# Altium PCB ADCAN_21_22.PcbDoc (part 2 of 2)
Units mm, origin at the board's own origin, x right, y up, seen from the top; angles counter-clockwise.
Board outline 65 x 55 mm, 4 copper layers (Top Layer, GND, 5V, Bottom Layer), stack 0.603 mm thick; 114 components, 59 nets, 280 pads, 0 vias.
Unrouted connection lines stored in the file: 212.
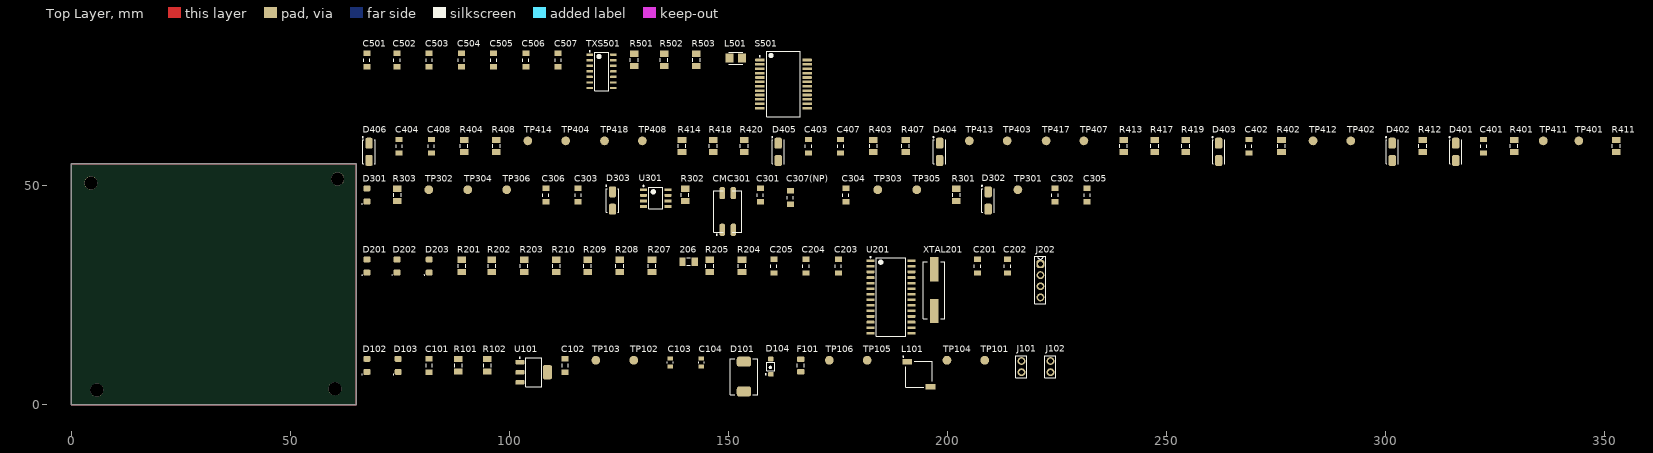
[diagram p0: Top Layer view]

## Part data (continued)
R204 R207: library part R2.2K-1206FTK, "Res Thick Film 1206 2.2K Ohm 1% 1/4W ±100ppm/°C Molded SMD SMD Paper Tape on Plastic Reel", Case Code (Imperial)=1206, Case Code (Metric)=3216, Manufacturer 1=Bourns, Max Operating Temperature=155°C, Max Power Dissipation=250mW, Min Operating Temperature=-55°C, Package Quantity=5000, Resistance=2.2kR, Resistance Tolerance=1%, Resistor Type="Thick Film", Supplier Part Number 1=CR1206-FX-2201ELFCT-ND, Temperature Coefficient=100ppm/°C, Voltage Rating=200V, Case/Package=1206, Category="Chip SMD Resistors", ComponentLink1Description=https://datasheet.ciiva.com/11809/0900766b80fcdb72-11809898.pdf?src-supplier=RSComponents, ComponentLink1URL=https://datasheet.ciiva.com/11809/0900766b80fcdb72-11809898.pdf?src-supplier=RSComponents, ComponentLink2Description=https://datasheet.ciiva.com/9123/chpreztr-9123227.pdf?src-supplier=Avnet, ComponentLink2URL=https://datasheet.ciiva.com/9123/chpreztr-9123227.pdf?src-supplier=Avnet, ComponentLink3Description=https://datasheet.ciiva.com/16770/70154685-16770447.pdf?src-supplier=Allied+Electronics, ComponentLink3URL=https://datasheet.ciiva.com/16770/70154685-16770447.pdf?src-supplier=Allied+Electronics, ComponentLink4Description=https://datasheet.ciiva.com/7985/1856384-7985879.pdf?src-supplier=Element14, ComponentLink4URL=https://datasheet.ciiva.com/7985/1856384-7985879.pdf?src-supplier=Element14, ComponentLink5Description=https://datasheet.ciiva.com/22693/1902866-22693258.pdf?src-supplier=Element14, ComponentLink5URL=https://datasheet.ciiva.com/22693/1902866-22693258.pdf?src-supplier=Element14, ComponentLink6Description=RS, ComponentLink6URL=https://es.rs-online.com/web/p/resistencias-fijas-para-montaje-en-superficie/7409097/, Construction=Rectangular, Contact Plating=Tin, Depth=1.6mm, Features="Moisture Resistant", Height=0.6mm, Length=3.2mm, Manufacturer Part Number 1=CR1206-FX-2201ELF, Military Standard=Not, Mount="Surface Mount", Number of Pins=2, Number of Terminations=2, Packaging="Tape and Reel", Power Rating=250mW, Pricing 1="1=0,10000, 10=0,04200, 100=0,01700, 1000=0,00762, 2500=0,00661 (USD)", Radiation Hardening=No, REACH SVHC="No SVHC", RoHS=Yes, RoHS Compliant=Yes, Series=CR1206, Stock 1=150, Supplier 1=Digi-Key, Technology="THICK FILM", Termination=SMD/SMT, Thickness=610um, Tolerance=1%, Voltage Rating (DC)=200V, Width=1.6mm
R301 R302: library part R60-1206FTN, "Res Precision Thin Film 60.4Ohm 0.1% 400mW 10ppm/°C 2-Pin 1206 SMD T/R", Manufacturer="TE Connectivity Holsworthy", Supplier Part Number 1=1872611, Category=Resistor, ComponentLink1Description=Datasheet, ComponentLink1URL=https://docs.rs-online.com/7017/0900766b8171e31c.pdf, ComponentLink2Description="Where buy it", ComponentLink2URL=https://es.rs-online.com/web/p/resistencias-de-montaje-en-superficie/1873086, Manufacturer Part Number=RQ73C2B60R4BTDF, Pricing 1="1000=1,73300 (GBP)", RoHS=Yes, Stock 1=650, Supplier 1=RSComponents
R401 R402 R403 R404 R411 R412 R413 R414 R417 R418: library part R1.6K-1206FTK, "Res Thick Film 1206 1.6K Ohm 1% 1/4W ±100ppm/°C Molded SMD SMD Paper T/R", Case Code (Imperial)=1206, Case Code (Metric)=3216, Manufacturer 1=Vishay, Max Operating Temperature=155°C, Max Power Dissipation=250mW, Min Operating Temperature=-55°C, Package Quantity=5000, Resistance=1.6kR, Resistance Tolerance=1%, Resistor Type="Thick Film", Supplier Part Number 1=541-1.60KFCT-ND, Temperature Coefficient=100ppm/°C, Voltage Rating=200V, Case/Package=1206, Category="Chip SMD Resistors", ComponentLink1Description=https://datasheet.ciiva.com/11811/0900766b80d98b5e-11811377.pdf?src-supplier=RSComponents, ComponentLink1URL=https://datasheet.ciiva.com/11811/0900766b80d98b5e-11811377.pdf?src-supplier=RSComponents, ComponentLink2Description=https://datasheet.ciiva.com/2515/dcrcwe3-2515616.pdf?src-supplier=Digi-Key, ComponentLink2URL=https://datasheet.ciiva.com/2515/dcrcwe3-2515616.pdf?src-supplier=Digi-Key, ComponentLink3Description=https://datasheet.ciiva.com/2515/dcrcwe3-2515617.pdf?src-supplier=Digi-Key, ComponentLink3URL=https://datasheet.ciiva.com/2515/dcrcwe3-2515617.pdf?src-supplier=Digi-Key, ComponentLink4Description=https://datasheet.ciiva.com/2515/dcrcwe3-2515618.pdf?src-supplier=Digi-Key, ComponentLink4URL=https://datasheet.ciiva.com/2515/dcrcwe3-2515618.pdf?src-supplier=Digi-Key, ComponentLink5Description=https://datasheet.ciiva.com/9098/dcrcwe3-9098889.pdf?src-supplier=Avnet, ComponentLink5URL=https://datasheet.ciiva.com/9098/dcrcwe3-9098889.pdf?src-supplier=Avnet, ComponentLink6Description=https://datasheet.ciiva.com/16213/dcrcwe3-16213498.pdf?src-supplier=Future+Electronics, ComponentLink6URL=https://datasheet.ciiva.com/16213/dcrcwe3-16213498.pdf?src-supplier=Future+Electronics, ComponentLink7Description=https://datasheet.ciiva.com/17203/dcrcwe3-17203786.pdf?src-supplier=Avnet+Europe, ComponentLink7URL=https://datasheet.ciiva.com/17203/dcrcwe3-17203786.pdf?src-supplier=Avnet+Europe, ComponentLink8Description=https://datasheet.ciiva.com/7670/1697337-7670316.pdf?src-supplier=Element14, ComponentLink8URL=https://datasheet.ciiva.com/7670/1697337-7670316.pdf?src-supplier=Element14, ComponentLink9Description=https://datasheet.ciiva.com/7670/1697337-7670317.pdf?src-supplier=Element14, ComponentLink9URL=https://datasheet.ciiva.com/7670/1697337-7670317.pdf?src-supplier=Element14, ComponentLink10Description=https://datasheet.ciiva.com/5550/dcrcwe3-109170-5550718.pdf?src-supplier=Mouser, ComponentLink10URL=https://datasheet.ciiva.com/5550/dcrcwe3-109170-5550718.pdf?src-supplier=Mouser, ComponentLink11Description=RS, ComponentLink11URL=https://es.rs-online.com/web/p/resistencias-fijas-para-montaje-en-superficie/6791866/, Construction=Rectangular, Contact Plating=Tin, Depth=1.6mm, Features="Automotive AEC-Q200", Height=0.55mm, Lead Free="Lead Free", Length=3.2mm, Manufacturer Part Number 1=CRCW12061K60FKEA, Military Standard=Not, Number of Pins=2, Number of Terminations=2, Packaging="Tape and Reel", Power Rating=250mW, Pricing 1="1=0,10000, 10=0,08200, 100=0,03160, 1000=0,01392, 2500=0,01202 (USD)", Radiation Hardening=No, REACH SVHC=Unknown, RoHS=Yes, RoHS Compliant=Yes, Series=CRCW, Size Code=1206, Supplier 1=Digi-Key, Technology="THICK FILM", Termination=SMD/SMT, Tolerance=1%, Voltage Rating (DC)=200V, Weight=0.000353oz, Width=0.063inch
R407 R408: library part R4.3K-1206FTK, "Res Thick Film 1206 4.3K Ohm 1% 1/4W ±100ppm/°C Molded SMD SMD Paper T/R", Case Code (Imperial)=1206, Case Code (Metric)=3216, Manufacturer 1=Vishay, Max Operating Temperature=155°C, Max Power Dissipation=250mW, Min Operating Temperature=-55°C, Package Quantity=10, Resistance=1.6kR, Resistance Tolerance=1%, Resistor Type="Thick Film", Supplier Part Number 1=541-4.30KFCT-ND, Temperature Coefficient=100ppm/°C, Voltage Rating=200V, Case/Package=1206, Category="Chip SMD Resistors", ComponentLink1Description=https://datasheet.ciiva.com/11811/0900766b80d98b5e-11811783.pdf?src-supplier=RSComponents, ComponentLink1URL=https://datasheet.ciiva.com/11811/0900766b80d98b5e-11811783.pdf?src-supplier=RSComponents, ComponentLink2Description=https://datasheet.ciiva.com/2497/dcrcwe3-2497360.pdf?src-supplier=Digi-Key, ComponentLink2URL=https://datasheet.ciiva.com/2497/dcrcwe3-2497360.pdf?src-supplier=Digi-Key, ComponentLink3Description=https://datasheet.ciiva.com/2497/dcrcwe3-2497361.pdf?src-supplier=Digi-Key, ComponentLink3URL=https://datasheet.ciiva.com/2497/dcrcwe3-2497361.pdf?src-supplier=Digi-Key, ComponentLink4Description=https://datasheet.ciiva.com/2497/dcrcwe3-2497362.pdf?src-supplier=Digi-Key, ComponentLink4URL=https://datasheet.ciiva.com/2497/dcrcwe3-2497362.pdf?src-supplier=Digi-Key, ComponentLink5Description=https://datasheet.ciiva.com/7679/1533075-7679286.pdf?src-supplier=Element14, ComponentLink5URL=https://datasheet.ciiva.com/7679/1533075-7679286.pdf?src-supplier=Element14, ComponentLink6Description=https://datasheet.ciiva.com/5562/dcrcwe3-109170-5562219.pdf?src-supplier=Mouser, ComponentLink6URL=https://datasheet.ciiva.com/5562/dcrcwe3-109170-5562219.pdf?src-supplier=Mouser, ComponentLink7Description=https://datasheet.ciiva.com/17196/dcrcwe3-17196843.pdf?src-supplier=Avnet+Europe, ComponentLink7URL=https://datasheet.ciiva.com/17196/dcrcwe3-17196843.pdf?src-supplier=Avnet+Europe, ComponentLink8Description=https://datasheet.ciiva.com/7679/1697337-7679213.pdf?src-supplier=Element14, ComponentLink8URL=https://datasheet.ciiva.com/7679/1697337-7679213.pdf?src-supplier=Element14, ComponentLink9Description=https://datasheet.ciiva.com/9073/dcrcwe3-9073935.pdf?src-supplier=Avnet, ComponentLink9URL=https://datasheet.ciiva.com/9073/dcrcwe3-9073935.pdf?src-supplier=Avnet, ComponentLink10Description=RS, ComponentLink10URL=https://es.rs-online.com/web/p/resistencias-fijas-para-montaje-en-superficie/6792187/, Construction=Rectangular, Contact Plating=Tin, Depth=1.6mm, Features="Automotive AEC-Q200", Height=0.55mm, Lead Free="Lead Free", Length=3.2mm, Manufacturer Part Number 1=CRCW12064K30FKEA, Military Standard=Not, Number of Pins=2, Number of Terminations=2, Packaging="Tape and Reel", Power Rating=250mW, Pricing 1="1=0,10000, 10=0,08200, 100=0,03160, 1000=0,01392, 2500=0,01202 (USD)", Radiation Hardening=No, REACH SVHC=Unknown, RoHS=Yes, RoHS Compliant=Yes, Series=CRCW, Supplier 1=Digi-Key, Technology="THICK FILM", Termination=SMD/SMT, Tolerance=1%, Voltage Rating (DC)=200V, Weight=0.000353oz, Width=0.063inch
R419 R420: library part R6.2K-1206FTK, "Res Thick Film 1206 6.19K Ohm 1% 1/4W ±100ppm/°C Molded SMD SMD Paper T/R", Case Code (Imperial)=1206, Case Code (Metric)=3216, Manufacturer 1=Vishay, Max Operating Temperature=155°C, Max Power Dissipation=250mW, Min Operating Temperature=-55°C, Package Quantity=10, Resistance=3.3kR, Resistance Tolerance=1%, Resistor Type="Thick Film", Supplier Part Number 1=541-6.19KFCT-ND, Temperature Coefficient=100ppm/°C, Voltage Rating=200V, Case/Package=1206, Category="Chip SMD Resistors", ComponentLink1Description=https://datasheet.ciiva.com/11818/0900766b80d98b5e-11818251.pdf?src-supplier=RSComponents, ComponentLink1URL=https://datasheet.ciiva.com/11818/0900766b80d98b5e-11818251.pdf?src-supplier=RSComponents, ComponentLink2Description=https://datasheet.ciiva.com/17193/dcrcwe3-17193575.pdf?src-supplier=Avnet+Europe, ComponentLink2URL=https://datasheet.ciiva.com/17193/dcrcwe3-17193575.pdf?src-supplier=Avnet+Europe, ComponentLink3Description=https://datasheet.ciiva.com/2496/dcrcwe3-2496955.pdf?src-supplier=Digi-Key, ComponentLink3URL=https://datasheet.ciiva.com/2496/dcrcwe3-2496955.pdf?src-supplier=Digi-Key, ComponentLink4Description=https://datasheet.ciiva.com/2496/dcrcwe3-2496956.pdf?src-supplier=Digi-Key, ComponentLink4URL=https://datasheet.ciiva.com/2496/dcrcwe3-2496956.pdf?src-supplier=Digi-Key, ComponentLink5Description=https://datasheet.ciiva.com/16201/dcrcwe3-16201468.pdf?src-supplier=Future+Electronics, ComponentLink5URL=https://datasheet.ciiva.com/16201/dcrcwe3-16201468.pdf?src-supplier=Future+Electronics, ComponentLink6Description=https://datasheet.ciiva.com/2496/dcrcwe3-2496957.pdf?src-supplier=Digi-Key, ComponentLink6URL=https://datasheet.ciiva.com/2496/dcrcwe3-2496957.pdf?src-supplier=Digi-Key, ComponentLink7Description=RS, ComponentLink7URL=https://es.rs-online.com/web/p/resistencias-fijas-para-montaje-en-superficie/6792291/, Construction=Rectangular, Contact Plating=Tin, Depth=1.6mm, Features="Automotive AEC-Q200", Height=0.55mm, Lead Free="Lead Free", Length=3.2mm, Manufacturer Part Number 1=CRCW12066K19FKEA, Military Standard=Not, Number of Terminations=2, Packaging="Tape and Reel", Power Rating=250mW, Pricing 1="1=0,10000, 10=0,08200, 100=0,03160, 1000=0,01392, 2500=0,01202 (USD)", Radiation Hardening=No, REACH SVHC=Unknown, RoHS=Yes, RoHS Compliant=Yes, Series=CRCW, Stock 1=66, Supplier 1=Digi-Key, Technology="THICK FILM", Termination=SMD/SMT, Tolerance=1%, Voltage Rating (DC)=200V, Weight=0.000353oz, Width=1.6mm
S501: library part Accel_SCC2230-D08, "Accelerometer and Gyroscope Digital Output 3.3V 24-Pin SOIC T/R", Case/Package=SMD/SMT, Manufacturer 1=Murata, Manufacturer Part Number 1=SCC2230-D08-05, Max Operating Temperature=125°C, Min Operating Temperature=-40°C, Supplier Part Number 1=490-12142-1-ND, Category="Inertial Measurement Units (IMUs)", ComponentLink1Description=https://www.murata.com/~/media/webrenewal/products/sensor/gyro/scc2000/scc2230-d08%20datasheet%2082177600b0.ashx?la=en&src-supplier=Digi-Key, ComponentLink1URL=https://www.murata.com/~/media/webrenewal/products/sensor/gyro/scc2000/scc2230-d08%20datasheet%2082177600b0.ashx?la=en&src-supplier=Digi-Key, ComponentLink2Description=Murata, ComponentLink2URL=https://www.murata.com/en-global/products/productdetail?partno=SCC2230-D08, Mount="Surface Mount", Output Type=SPI, Packaging="Tape and Reel", Pricing 1="1=92,29000, 5=87,67600, 10=80,75400, 25=71,52480 (USD)", RoHS=Yes, RoHS Compliant=Yes, Sensor Type="Accelerometer,Gyroscope,3 Axis", Stock 1=296, Supplier 1=Digi-Key
TP101 TP102 TP103 TP104 TP105 TP106 TP301 TP302 TP303 TP304 TP305 TP306 TP401 TP402 TP403 TP404 TP407 TP408 TP411 TP412 TP413 TP414 TP417 TP418: "Test Point 1x1 mm", Category=TestPoint
TXS501: library part 4bitBVL_TXS0104E, "4-Bit Bidirectional Voltage-Level Shifter for Open-Drain and Push-Pull Applications 14-SOIC -40 to 85", Case/Package=SOIC, High Level Output Current=-20uA, Low Level Output Current=1mA, Manufacturer 1="Texas Instruments", Manufacturer Part Number 1=TXS0104ED, Max Operating Temperature=85°C, Max Supply Voltage=5.5V, Min Operating Temperature=-40°C, Min Supply Voltage=1.65V, Nominal Supply Current=12uA, Package Quantity=50, Quiescent Current=14.4uA, Supplier Part Number 1=296-34699-5-ND, Category="Voltage Level Shifters", ComponentLink1Description=https://datasheet.ciiva.com/1628/txs0104e-1628720.pdf?src-supplier=Newark, ComponentLink1URL=https://datasheet.ciiva.com/1628/txs0104e-1628720.pdf?src-supplier=Newark, ComponentLink2Description=https://datasheet.ciiva.com/15096/getdatasheetpartid-226007-15096240.pdf?src-supplier=Verical, ComponentLink2URL=https://datasheet.ciiva.com/15096/getdatasheetpartid-226007-15096240.pdf?src-supplier=Verical, ComponentLink3Description=https://datasheet.ciiva.com/41455/001017332-da-01-en-ic-4bit-transltr-txs0104ed-soic-14-tid-41455684.pdf?src-supplier=Conrad, ComponentLink3URL=https://datasheet.ciiva.com/41455/001017332-da-01-en-ic-4bit-transltr-txs0104ed-soic-14-tid-41455684.pdf?src-supplier=Conrad, ComponentLink4Description=https://datasheet.ciiva.com/1508/1811230-1508823.pdf?src-supplier=Element14, ComponentLink4URL=https://datasheet.ciiva.com/1508/1811230-1508823.pdf?src-supplier=Element14, ComponentLink5Description=https://datasheet.ciiva.com/6615/txs0104e-6615001.pdf?src-supplier=Digi-Key, ComponentLink5URL=https://datasheet.ciiva.com/6615/txs0104e-6615001.pdf?src-supplier=Digi-Key, ComponentLink6Description="RS uk", ComponentLink6URL=https://uk.rs-online.com/web/p/translator-ics/9236848, Data Rate=24Mbps, Height=1.58mm, Lead Free="Lead Free", Length=8.65mm, Logic Function=Translator, Mount="Surface Mount", Number of Bits=4, Number of Channels=4, Number of Circuits=1, Number of Inputs=4, Number of Pins=14, Output Current=1mA, Output Type=Voltage, Packaging=Rail/Tube, Pricing 1="1=1,54000, 10=1,37600, 25=1,30600, 100=1,07270, 250=1,00276, 500=0,88616, 1000=0,77000 (USD)", Propagation Delay=260ns, Radiation Hardening=No, REACH SVHC="No SVHC", RoHS=Yes, RoHS Compliant=Yes, Series=-, Stock 1=9570, Supplier 1=Digi-Key, Turn-On Delay Time=260ns, Weight=0.004564oz, Width=3.91mm
U101: library part LDO_10V-0.8/3V3-SOT223, "LDO Regulator Pos 3.3V 0.8A 4-Pin(3+Tab) SOT-223 T/R / IC REG LDO 3.3V 0.8A SOT223", Case/Package=SOT-223, Current Rating=800A, Dropout Voltage=1.2V, Manufacturer="Texas Instruments", Max Input Voltage=15V, Max Operating Temperature=125°C, Max Output Current=800mA, Max Supply Voltage=10V, Min Input Voltage=2.6V, Min Operating Temperature=-40°C, Min Supply Voltage=4.75V, Nominal Output Voltage=3.3V, Output Voltage Accuracy=1%, Package Quantity=1000, Quiescent Current=15mA, Supplier Part Number 1=LM1117IMP-3.3/NOPBCT-ND, Accuracy=1%, Category=LDO, ComponentLink1Description=Datasheet, ComponentLink1URL=https://www.ti.com/lit/ds/symlink/lm1117.pdf?HQS=dis-mous-null-mousermode-dsf-pf-null-wwe&DCM=yes&ref_url=https%3A%2F%2Fwww.mouser.de%2F&distId=26, ComponentLink2Description="Where buy it", ComponentLink2URL=https://www.mouser.es/ProductDetail/Texas-Instruments/LM1117IMP-33-NOPB?qs=X1J7HmVL2ZFbpN1TgOsjYQ%3D%3D, ComponentLink3Description=https://datasheet.ciiva.com/27051/1281318-27051810.pdf?src-supplier=Jameco, ComponentLink3URL=https://datasheet.ciiva.com/27051/1281318-27051810.pdf?src-supplier=Jameco, ComponentLink4Description=https://datasheet.ciiva.com/8042/1670636-8042261.pdf?src-supplier=Element14, ComponentLink4URL=https://datasheet.ciiva.com/8042/1670636-8042261.pdf?src-supplier=Element14, ComponentLink5Description=https://datasheet.ciiva.com/1570/1849796-1570171.pdf?src-supplier=Farnell, ComponentLink5URL=https://datasheet.ciiva.com/1570/1849796-1570171.pdf?src-supplier=Farnell, ComponentLink6Description=https://datasheet.ciiva.com/14149/lm1117-eng-tds-14149980.pdf?src-supplier=Distrelec, ComponentLink6URL=https://datasheet.ciiva.com/14149/lm1117-eng-tds-14149980.pdf?src-supplier=Distrelec, ComponentLink7Description=https://datasheet.ciiva.com/46386/1882372-46386042.pdf?src-supplier=Element14, ComponentLink7URL=https://datasheet.ciiva.com/46386/1882372-46386042.pdf?src-supplier=Element14, ComponentLink8Description=https://datasheet.ciiva.com/3223/lm1117-n-3223515.pdf?src-supplier=Avnet, ComponentLink8URL=https://datasheet.ciiva.com/3223/lm1117-n-3223515.pdf?src-supplier=Avnet, ComponentLink9Description=https://datasheet.ciiva.com/6580/lm1117-n-6580030.pdf?src-supplier=Digi-Key, ComponentLink9URL=https://datasheet.ciiva.com/6580/lm1117-n-6580030.pdf?src-supplier=Digi-Key, ComponentLink10Description=https://datasheet.ciiva.com/6580/lm1117-n-6580026.pdf?src-supplier=Digi-Key, ComponentLink10URL=https://datasheet.ciiva.com/6580/lm1117-n-6580026.pdf?src-supplier=Digi-Key, Height=1.6mm, Lead Free="Lead Free", Length=6.5mm, Manufacturer Part Number=LM1117IMP-3.3/NOPB, Min Current Limit=800mA, Mount="Surface Mount", Number of Outputs=1, Number of Pins=4, Number of Regulators=1, Output Current=800mA, Output Type=Fixed, Output Voltage=3.3V, Packaging="Tape and Reel", Polarity=Positive, Pricing 1="1=1,41000, 10=1,26300, 25=1,19920, 100=0,98500, 250=0,92072, 500=0,81366 (USD)", Radiation Hardening=No, REACH SVHC="No SVHC", RoHS=Yes, RoHS Compliant=Yes, Supplier 1=Digi-Key, Termination=SMD/SMT, Width=3.56mm
U201: library part U_PIC18F2685, "PIC18F2685-E/SO; 8bit PIC Microcontroller; 40MHz; 96kb; 1024 B Flash; 28-Pin SOIC", Case/Package=SOIC, Frequency=40MHz, Manufacturer 1=Microchip, Manufacturer Part Number 1=PIC18F2685-E/SO, Max Operating Temperature=125°C, Max Power Dissipation=1W, Max Supply Voltage=5.5V, Min Operating Temperature=-40°C, Min Supply Voltage=2V, Operating Supply Voltage=5V, Package Quantity=27, Supplier Part Number 1=PIC18F2685-E/SO-ND, Access Time=40us, Category=Microcontrollers, ComponentLink1Description=https://datasheet.ciiva.com/9244/jp026433-9244309.pdf?src-supplier=Avnet, ComponentLink1URL=https://datasheet.ciiva.com/9244/jp026433-9244309.pdf?src-supplier=Avnet, ComponentLink2Description=https://datasheet.ciiva.com/7892/721078-7892299.pdf?src-supplier=Element14, ComponentLink2URL=https://datasheet.ciiva.com/7892/721078-7892299.pdf?src-supplier=Element14, ComponentLink3Description=https://datasheet.ciiva.com/1584/39761c-1584094.pdf?src-supplier=Digi-Key, ComponentLink3URL=https://datasheet.ciiva.com/1584/39761c-1584094.pdf?src-supplier=Digi-Key, Core Architecture=PIC, Data Bus Width=8b, Height=2.35mm, Interface=I2C,SPI,CAN,UART,USART, Lead Free="Lead Free", Length=17.9mm, Max Frequency=40MHz, Memory Size=96KB, Memory Type=FLASH, Mount="Surface Mount", Number of ADC Channels=8, Number of I2C Channels=1, Number of I/Os=25, Number of Pins=28, Number of Programmable I/O=28, Number of SPI Channels=1, Number of Timers/Counters=4, Packaging=Rail/Tube, Pricing 1="81=12,58494 (USD)", Radiation Hardening=No, RAM Size=3.25KB, REACH SVHC="No SVHC", RoHS=Yes, RoHS Compliant=Yes, Supplier 1=Digi-Key, Watchdog Timer=Yes, Width=7.5mm
U301: library part Transceiver_CAN, "CAN Transceiver, 4.5 to 5.5V, 70mA, -40 to 150C, SOIC-8, RoHS", Case/Package=SOIC, Manufacturer=Digi-Key, Manufacturer part=Microchip, Max Operating Temperature=85°C, Max Supply Current=75mA, Max Supply Voltage=5.5V, Min Operating Temperature=-40°C, Min Supply Voltage=4.5V, Operating Supply Voltage=5V, Package Quantity=100, Supplier Part Number 1=MCP2561-H/SN-ND, Category="Transceiver CAN", ComponentLink1Description=Datasheet, ComponentLink1URL=https://pdf1.alldatasheet.com/datasheet-pdf/view/514790/MICROCHIP/MCP2561.html, ComponentLink2Description="Where buy it", ComponentLink3Description=https://datasheet.ciiva.com/18624/25167b-18624813.pdf?src-supplier=Digi-Key, ComponentLink3URL=https://datasheet.ciiva.com/18624/25167b-18624813.pdf?src-supplier=Digi-Key, Data Rate=1Mbps, Interface=CAN, Manufacturer Part Number=MCP2561-H/SN, Mount=SMD, Nominal Supply Current=75mA, Number of Drivers=1, Number of Pins=8, Number of Receive Buffers=1, Number of Receivers=1, Number of Transceivers=1, Number of Transmit Buffers=1, Packaging=Rail/Tube, Pricing 1="1=1,17000, 25=0,96480, 100=0,90000 (USD)", Propagation Delay=125ns, Radiation Hardening=No, REACH SVHC="No SVHC", RoHS=Yes, RoHS Compliant=Yes, Slew Rate=8.5V/µs, Supplier 1=Digi-Key, Turn-On Delay Time=125ns
XTAL201: library part XTAL20M_SMD, "830028710, 20 MHz", Frequency="20 MHz", Frequency Stability="+-50 ppm", Manufacturer="Würth Elektronik", Max operating temperature.=85ºC, Min Operating Temperature=-40ºC, Supplier Part Number 1=1923-830028710CT-ND, Category=XTAL, ComponentLink1Description=Datasheet, ComponentLink1URL=https://www.we-online.com/catalog/datasheet/830028710.pdf, ComponentLink2Description="Where buy it", Drive level="500µW max", Manufacturer Part Number=830028710, Number of Pins=2, Packaging=Reel, Pricing 1="1=0,37000, 10=0,28100, 50=0,26800, 100=0,24400, 500=0,22000 (USD)", RoHS=Yes, Stock 1=975, Supplier="Würth Elektronik", Supplier 1=Digi-Key, Type=SMD

## Free pads (board coordinates)
  round 3 hole 3: 12(4.428,50.65) 12(5.775,3.35) 12(60.175,3.65) 12(60.775,51.55)

## Nets (pads, with @x,y where several pads share a name; then routed paths per layer and width w, separated by ;. In a path a pad name is that pad's centre, name@x,y a point inside that pad or via, vN(x,y) a via of type N, cw(c..) or ccw(c..) an arc to the next point about the centre after c; other vN are vias at no path point)
+3.3: C102.2 C504.2 C505.2 C506.2 C507.2 L501.2 R102.2 R501.2 R502.2 R503.2 S501.9 S501.14 TP103.1 TXS501.1 TXS501.8 U101.2 U101.4
+5: C101.2 C203.2 C204.2 C205.2 J202.1 R101.2 R208.2 R209.2 R210.2 TXS501.14 U101.3 U201.20 U301.3
APPS1: C401.2 R401.2 R411.1 TP401.1 U201.2
APPS1_s: D401.1 R411.2 TP411.1
APPS2: C402.2 R402.2 R412.1 TP402.1 U201.3
APPS2_s: D402.1 R412.2 TP412.1
Brake: C403.2 R403.2 R413.1 TP403.1 U201.4
Brake_s: 
Brake_s: D403.1 D404.1 R413.2 R414.2 TP413.1 TP414.1
CAN2_ADRX: TP302.1 U201.24 U301.4
CAN2_ADTX: TP301.1 U201.23 U301.1
CAN2_H: C305.1 C307(NP).2 CMC301.4 D302.2 R301.2 TP305.1
CAN2_L: C306.2 C307(NP).1 CMC301.3 D303.2 R302.1 TP306.1
CAN2sf_H: C301.2 C302.1 CMC301.1 TP303.1 U301.7
CAN2sf_L: C301.1 C303.2 CMC301.2 TP304.1 U301.6
CLKi: C201.1 U201.9 XTAL201.1
CLKo: C202.1 U201.10 XTAL201.2
CSB: R204.2 R205.2 S501.18
EUSART_RX: J202.3 U201.18
EUSART_TX: J202.4 U201.17
LED_aux: R202.2 U201.6
LED_CAN2: R303.2 U201.11
LED_error: R203.2 U201.13
LED_pic: R201.2 U201.12
LV+in: D101.2 D104.A J101.1 TP106.1
LV-in: 206.1 C101.1 C102.1 C103.1 C104.1 C201.2 C202.2 C203.1 C204.1 C205.1 C302.2 C303.1 C304.2 C305.2 C306.1 C401.1 C402.1 C403.1 C404.1 C407.1 C408.1 C501.2 C502.2 C503.2 C504.1 C505.1 C506.1 C507.1 D101.1 D102.K D103.K D201.K D202.K D203.K D301.K D302.1 D303.1 D401.2 D402.2 D403.2 D404.2 D405.2 D406.2 J202.2 pad.12 R205.1 R401.1 R402.1 R403.1 R404.1 R407.1 R408.1 S501.1 S501.8 S501.12 S501.13 S501.16 S501.17 S501.24 TP102.1 TXS501.7 U101.1 U201.8 U201.19 U201.26 U301.2 U301.8
MCU_CSB: R204.1 U201.22
MCU_RST: R207.1 U201.21
MISO: R502.1 S501.5 TXS501.3
MISO_5V: R209.1 TXS501.12 U201.15
MOSI: R501.1 S501.19 TXS501.2
MOSI_5V: R210.1 TXS501.13 U201.16
NetC103_2: C103.2 D104.K J101.2 J102.1 L101.1 TP105.1
NetC104_2: C104.2 F101.1 J102.2 L101.2 TP104.1
NetC304_1: C304.1 R301.1 R302.2
NetC407_2: C407.2 R417.1 R419.2
NetC408_2: C408.2 R418.1 R420.2
NetC501_1: C501.1 S501.10
NetC502_1: C502.1 S501.15
NetC503_1: C503.1 S501.6
NetD102_A: D102.A R101.1
NetD103_A: D103.A R102.1
NetD201_A: D201.A R201.1
NetD202_A: D202.A R202.1
NetD203_A: D203.A R203.1
NetD301_A: D301.A R303.1
NetDCDC1_1: F101.2 TP101.1
NetJ201_1: U201.1
NetL501_1: L501.1 S501.7
PGC: U201.27
PGD: U201.28
RST: 206.2 R207.2 S501.3
SCK: R503.1 S501.4 TXS501.4
SCK_5V: R208.1 TXS501.11 U201.14
Steering: C404.2 R404.2 R414.1 TP404.1 U201.5
SuspeFL_s: D406.1 R418.2 TP418.1
SuspeFR_s: D405.1 R417.2 TP417.1
Suspension_FL: R408.2 R420.1 TP408.1 U201.25
Suspension_FR: R407.2 R419.1 TP407.1 U201.7
pads on no net: S501.2 S501.11 S501.20 S501.21 S501.22 S501.23 TXS501.5 TXS501.6 TXS501.9 TXS501.10 U301.5

## Polygon pours and split planes (outlines as drawn)
no net on GND (split plane): 64.49,0.51 0.51,0.51 0.51,54.49 64.49,54.49
no net on 5V (split plane): 64.49,0.51 0.51,0.51 0.51,54.49 64.49,54.49

## Other copper
Multi-Layer:
  the board outline again, w0.254